# EAGLE board Lsensor (EAGLE 7.4.0)
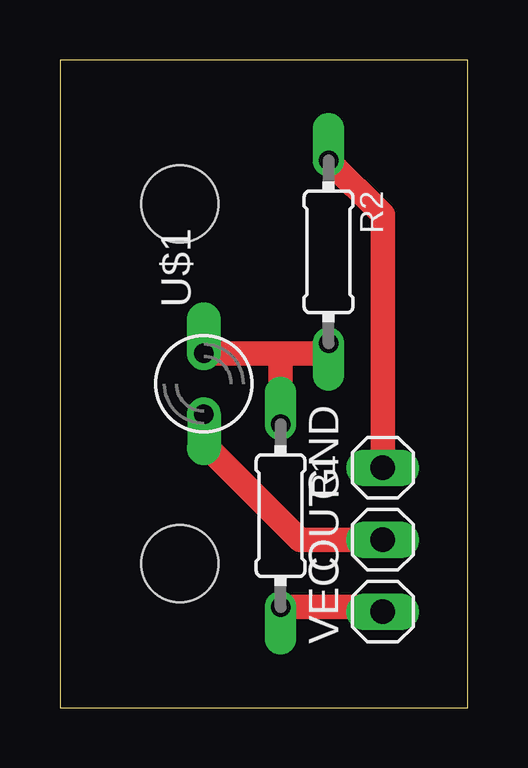
[diagram p0: board, top side]

Size 17 x 27 mm. Coordinates in mm from the lower left corner, seen from the top.
Outline: 0,0 17,0 17,27 0,27 0,0
Copper layers (1*16): Top 0.035mm / dielectric 1.5mm / Bottom 0.035mm
Design rules "default *": minimum track width 10mil, minimum drill 24mil, track to track 0.4mm, track to pad 0.4mm, pad to pad 0.4mm, via to via 0.4mm, smd to smd 0.4mm, copper to edge 0.010159375mm, drill to drill 8mil, minimum pad ring 10mil, minimum via ring 8mil, stop-mask expansion 4mil, vias tented up to drill 0mil, thermal gap 10mil
Holes 3.2 mm at 5,21 5,6

## Footprints (pad centres in the part's own frame; a part is rotated, then mirrored left to right if it is on the bottom)
1X01 = drill 1.016 long: 1 0,0
0204/7 = drill 0.813 offset: 1 -3.81,0; 2 3.81,0
5MM = drill 0.813 pad 1.422 offset: IN -1.27,0; OUT 1.27,0

## Placement (x,y rotation side)
GND  [1X01]  13.46,10 90 top
OUT  [1X01]  13.46,7 90 top
R1  RES_7MM  [0204/7]  9.2,8 270 top
R2  RES_7MM  [0204/7]  11.2,19 270 top
U$1  LED  [5MM]  6,13.5 90 top
VEC  [1X01]  13.46,4 90 top

## Library data of the parts
GND OUT R1 R2 U$1 VEC = Yamaguchi

## Nets
N$1: R1.2 VEC.1
N$2: OUT.1 U$1.IN
N$3: R1.1 R2.2 U$1.OUT
N$4: GND.1 R2.1

## Tracks (layer width: path | path; a pad name or v marks a point on that pad's centre or on a via)
N$1
  Top 1.016: R1.2 13.46,4.19 VEC.1
N$2
  Top 1.016: U$1.IN 6,11 10,7 OUT.1
N$3
  Top 0.813: 10.78,14.77 R2.2
  Top 1.016: U$1.OUT 9,14.77 | 9,14.77 10.78,14.77 | R1.1 9.2,14.57 9,14.77
N$4
  Top 1.016: R2.1 13.46,20.55 GND.1